# EAGLE board Adaptor485_MODIF_PT_ELECROW (EAGLE 6.5.0), part 1 of 2
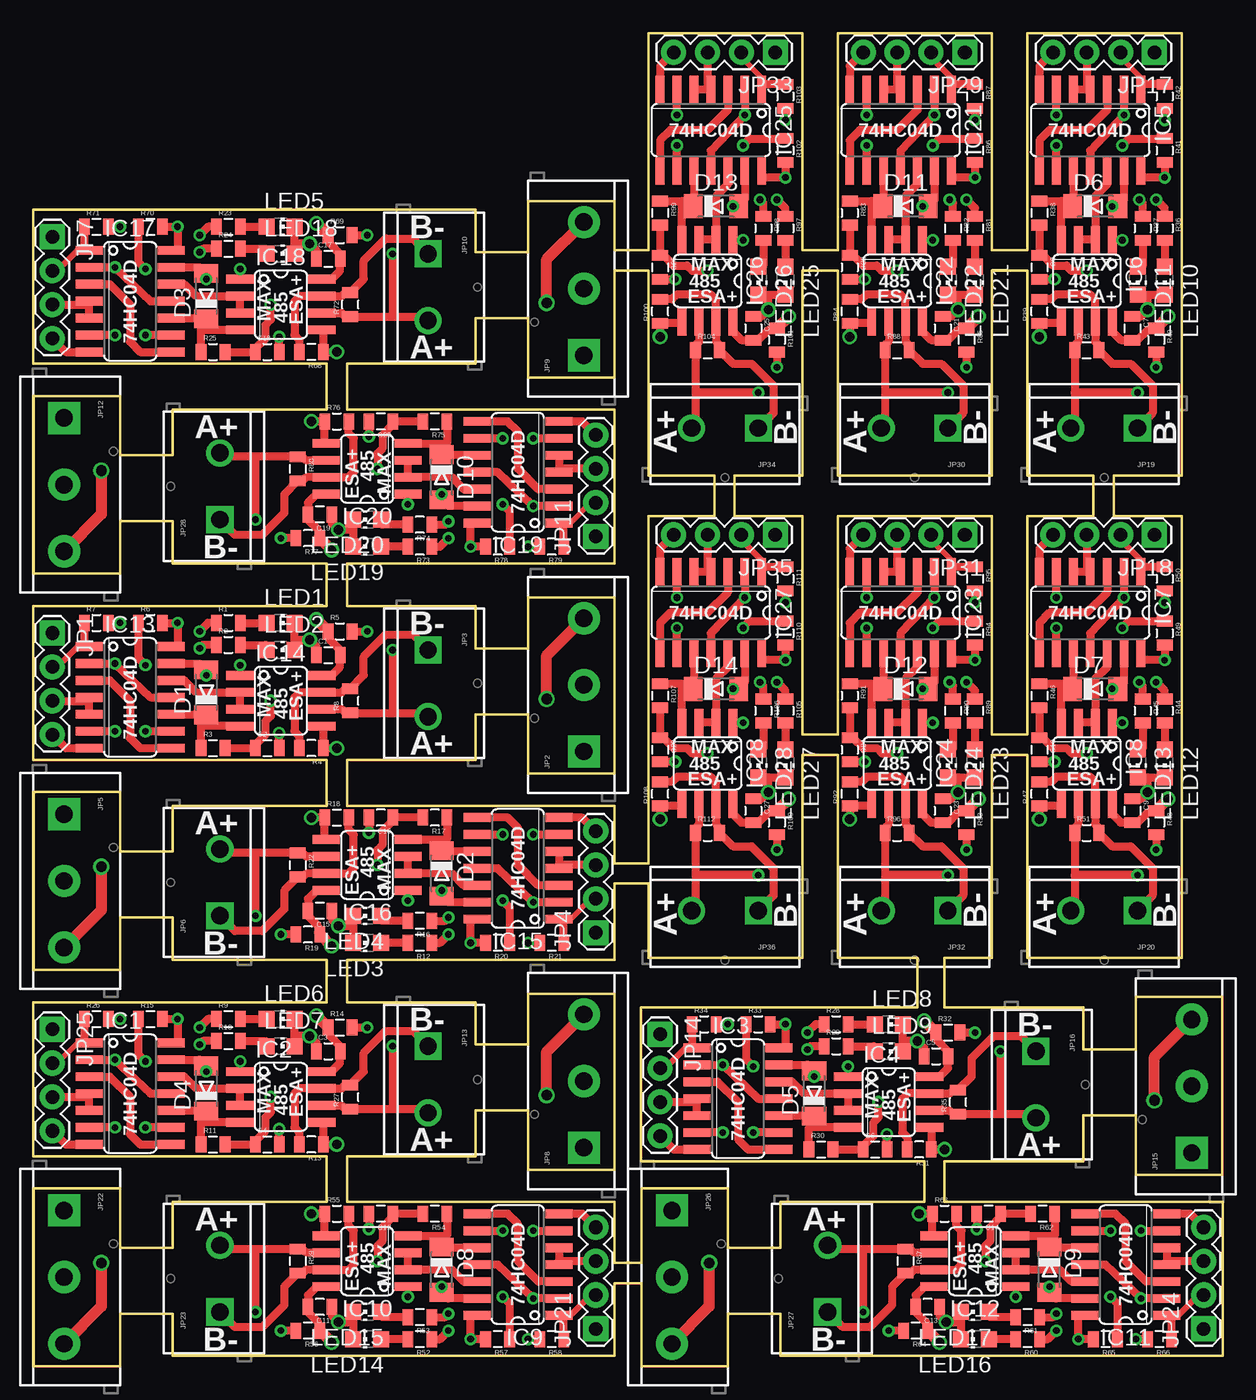
[diagram p0: board, top side]
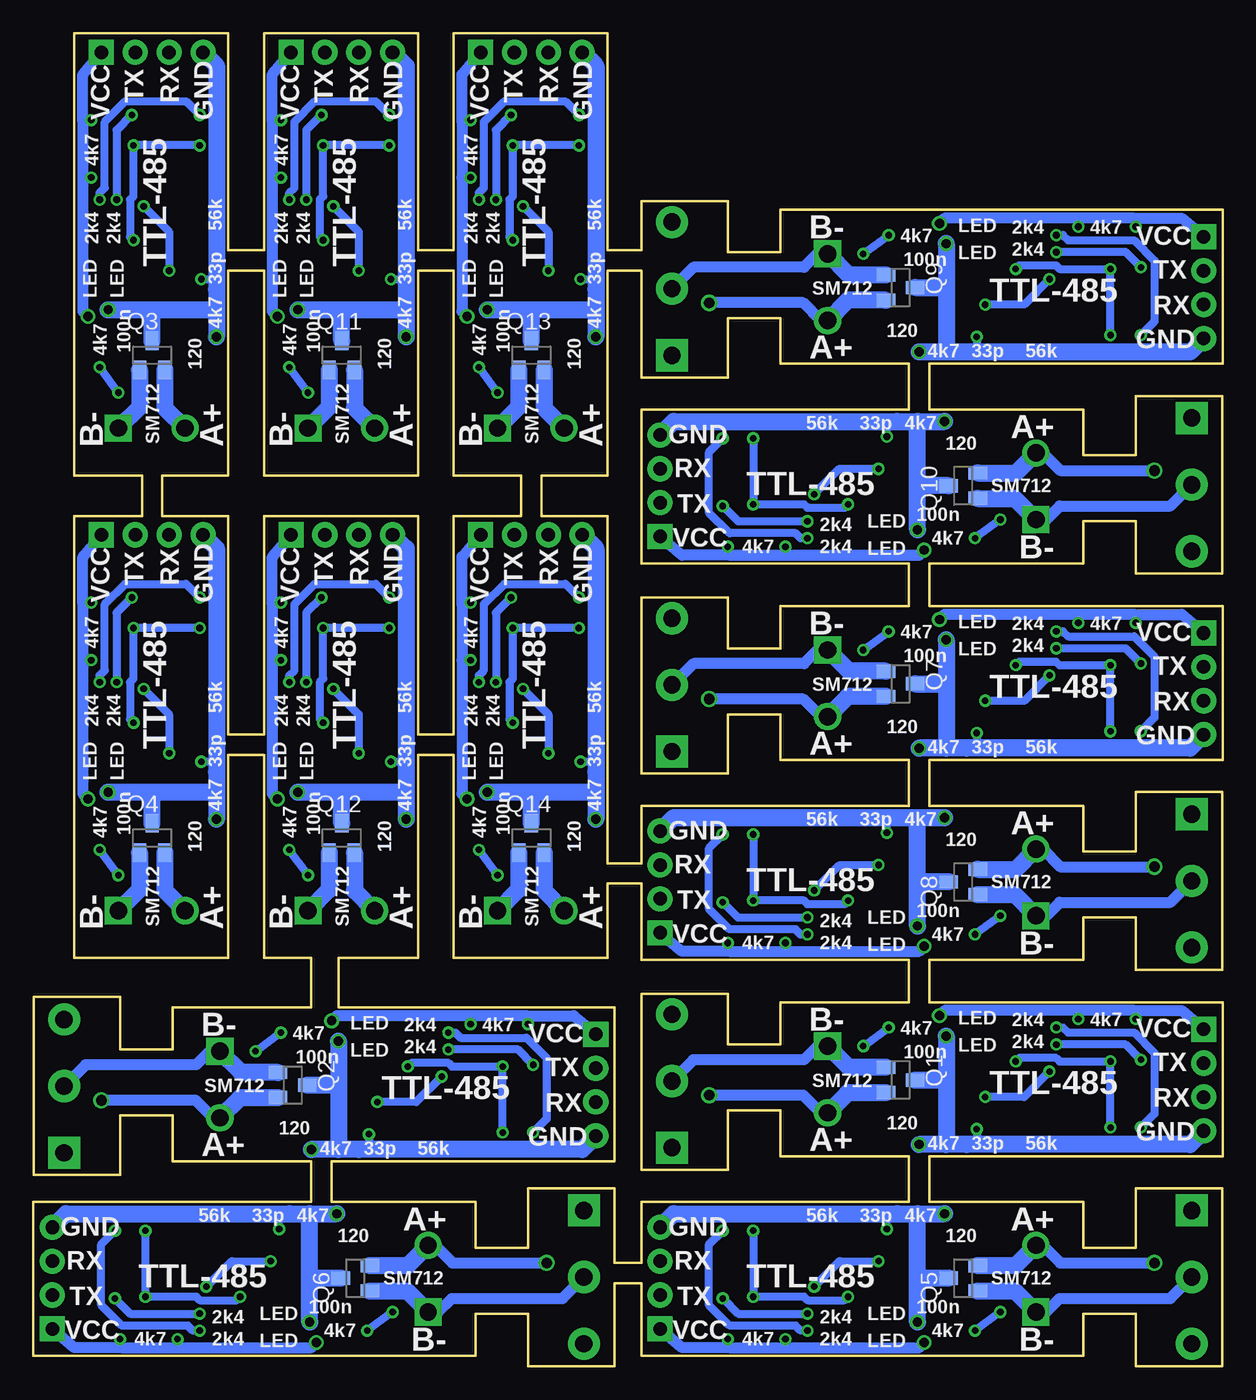
[diagram p1: board, bottom side, seen from below]

Size 89.2 x 99.97 mm. Coordinates in mm from the lower left corner, seen from the top.
Outline: 37.11,24.13 33.17,24.13 33.17,27.3 23.52,27.3 23.52,30.48 43.59,30.48 43.59,36.2 46.13,36.2 46.13,30.61 57.68,30.61 57.68,45.85 60.35,45.85 60.35,30.61 66.32,30.61 66.32,26.92 45.59,26.92 45.59,15.37 66.83,15.37 66.83,12.32 56.03,12.32 56.03,8.89 52.1,8.89 52.1,13.34 45.62,13.34 45.62,7.75 43.59,7.75 43.59,12.32 23.52,12.32 23.52,15.75 33.17,15.75 33.17,19.18 37.11,19.18 37.11,14.73 43.59,14.73 43.59,27.94 37.11,27.94 37.11,24.13
Outline: 22,27.3 0,27.3 0,15.75 22,15.75 22,12.32 10.44,12.32 10.44,8.89 6.5,8.89 6.5,13.34 0.03,13.34 0.03,0 6.5,0 6.5,3.94 10.44,3.94 10.44,0.76 43.59,0.76 43.59,6.22 45.62,6.22 45.62,0 52.1,0 52.1,3.94 56.03,3.94 56.03,0.76 89.2,0.76 89.2,12.32 68.35,12.32 68.35,15.37 78.77,15.37 78.77,18.8 82.7,18.8 82.7,14.35 89.18,14.35 89.18,27.69 82.7,27.69 82.7,23.75 78.77,23.75 78.77,26.92 68.35,26.92 68.35,30.61 71.91,30.61 71.91,45.85 74.57,45.85 74.57,30.61 86.13,30.61 86.13,63.75 81.05,63.75 81.05,66.8 86.13,66.8 86.13,99.97 74.57,99.97 74.57,83.69 71.91,83.69 71.91,99.97 60.35,99.97 60.35,83.69 57.68,83.69 57.68,99.97 46.13,99.97 46.13,83.69 43.59,83.69 43.59,87.38 37.11,87.38 37.11,83.57 33.17,83.57 33.17,86.74 0,86.74 0,75.18 22,75.18 22,71.75 10.44,71.75 10.44,68.33 6.5,68.33 6.5,72.77 0.03,72.77 0.03,59.44 6.5,59.44 6.5,63.37 10.44,63.37 10.44,60.2 22,60.2 22,57.02 0,57.02 0,45.47 22,45.47 22,42.04 10.44,42.04 10.44,38.61 6.5,38.61 6.5,43.05 0.03,43.05 0.03,29.72 6.5,29.72 6.5,33.66 10.44,33.66 10.44,30.48 22,30.48 22,27.3
Outline: 74.57,82.17 74.57,66.8 79.53,66.8 79.53,63.75 74.57,63.75 74.57,47.37 71.91,47.37 71.91,63.75 60.35,63.75 60.35,47.37 57.68,47.37 57.68,63.75 52.6,63.75 52.6,66.8 57.68,66.8 57.68,82.17 60.35,82.17 60.35,66.8 71.91,66.8 71.91,82.17 74.57,82.17
Outline: 37.11,53.85 33.17,53.85 33.17,57.02 23.52,57.02 23.52,60.2 43.59,60.2 43.59,71.75 23.52,71.75 23.52,75.18 33.17,75.18 33.17,78.61 37.11,78.61 37.11,74.17 43.59,74.17 43.59,82.17 46.13,82.17 46.13,66.8 51.08,66.8 51.08,63.75 46.13,63.75 46.13,37.72 43.59,37.72 43.59,42.04 23.52,42.04 23.52,45.47 33.17,45.47 33.17,48.9 37.11,48.9 37.11,44.45 43.59,44.45 43.59,57.66 37.11,57.66 37.11,53.85
Copper layers (1*16): Top 0.035mm / dielectric 1.5mm / Bottom 0.035mm
Design rules "default *": minimum track width 10mil, minimum drill 24mil, track to track 8mil, track to pad 8mil, pad to pad 8mil, via to via 8mil, smd to smd 8mil, copper to edge 40mil, drill to drill 8mil, minimum pad ring 10mil, minimum via ring 8mil, stop-mask expansion 4mil, vias tented up to drill 24mil, thermal gap 10mil

## Footprints (pad centres in the part's own frame; a part is rotated, then mirrored left to right if it is on the bottom)
0805 = smd 0.8 x 1.2: 1 -0.9,0; 2 0.9,0
MINIMELF = smd 1.4 x 1.8: A 1.7,0; C -1.7,0
SO14 = smd 0.66 x 2.032: 1 -3.81,-3.073; 2 -2.54,-3.073; 3 -1.27,-3.073; 4 0,-3.073; 5 1.27,-3.073; 6 2.54,-3.073; 7 3.81,-3.073; 8 3.81,3.073; 9 2.54,3.073; 10 1.27,3.073; 11 0,3.073; 12 -1.27,3.073; 13 -2.54,3.073; 14 -3.81,3.073
SO08 = smd 0.66 x 2.032: 1 -1.905,-3.073; 2 -0.635,-3.073; 3 0.635,-3.073; 4 1.905,-3.073; 5 1.905,3.073; 6 0.635,3.073; 7 -0.635,3.073; 8 -1.905,3.073
1X04 = drill 1.016 pad 1.88 square: 1 0,0 | drill 1.016 pad 1.88: 2 2.54,0; 3 5.08,0; 4 7.62,0
SCREWTERMINAL-5MM-3 = drill 1.3 pad 2.413 square: 1 0,0 | drill 1.3 pad 2.413: 2 5,0; 3 10,0
SCREWTERMINAL-5MM-2 = drill 1.3 pad 2.032 square: 1 0,0 | drill 1.3 pad 2.032: 2 5,0
CHIP-LED0805 = smd 1.2 x 1.2: A 0,-1.05; C 0,1.05
SOT23 = smd 1 x 1.4: 1 -0.95,-1.1; 2 0.95,-1.1; 3 0,1.1

## Placement (x,y rotation side)
C1  100n  [0805]  22.12,53.34 0 top
C2  33pF  [0805]  17.55,46.35 0 top
C3  100n  [0805]  22.12,23.62 0 top
C4  33pF  [0805]  17.55,16.64 0 top
C5  100n  [0805]  67.72,23.24 0 top
C6  33pF  [0805]  63.14,16.26 0 top
C7  100n  [0805]  82.45,77.85 270 top
C8  33pF  [0805]  75.46,82.42 270 top
C9  100n  [0805]  82.45,41.66 270 top
C10  33pF  [0805]  75.46,46.23 270 top
C11  100n  [0805]  21.49,4.45 180 top
C12  33pF  [0805]  26.06,11.43 180 top
C13  100n  [0805]  67.08,4.45 180 top
C14  33pF  [0805]  71.65,11.43 180 top
C15  100n  [0805]  21.49,34.16 180 top
C16  33pF  [0805]  26.06,41.15 180 top
C17  100n  [0805]  22.12,83.06 0 top
C18  33pF  [0805]  17.55,76.07 0 top
C19  100n  [0805]  21.49,63.88 180 top
C20  33pF  [0805]  26.06,70.87 180 top
C21  100n  [0805]  68.22,77.85 270 top
C22  33pF  [0805]  61.24,82.42 270 top
C23  100n  [0805]  68.22,41.66 270 top
C24  33pF  [0805]  61.24,46.23 270 top
C25  100n  [0805]  54,77.85 270 top
C26  33pF  [0805]  47.02,82.42 270 top
C27  100n  [0805]  54,41.66 270 top
C28  33pF  [0805]  47.02,46.23 270 top
D1  1N4148  [MINIMELF]  12.98,50.55 90 top
D2  1N4148  [MINIMELF]  30.63,36.96 270 top
D3  1N4148  [MINIMELF]  12.98,80.26 90 top
D4  1N4148  [MINIMELF]  12.98,20.83 90 top
D5  1N4148  [MINIMELF]  58.57,20.45 90 top
D6  1N4148  [MINIMELF]  79.65,87 0 top
D7  1N4148  [MINIMELF]  79.65,50.8 0 top
D8  1N4148  [MINIMELF]  30.63,7.24 270 top
D9  1N4148  [MINIMELF]  76.23,7.24 270 top
D10  1N4148  [MINIMELF]  30.63,66.67 270 top
D11  1N4148  [MINIMELF]  65.43,87 0 top
D12  1N4148  [MINIMELF]  65.43,50.8 0 top
D13  1N4148  [MINIMELF]  51.21,87 0 top
D14  1N4148  [MINIMELF]  51.21,50.8 0 top
IC1  74HC04D  [SO14]  7.26,20.45 270 top
IC2  MAX3468CSA  [SO08]  18.57,20.19 270 top
IC3  74HC04D  [SO14]  52.86,20.07 270 top
IC4  MAX3468CSA  [SO08]  64.16,19.81 270 top
IC5  74HC04D  [SO14]  79.27,92.71 180 top
IC6  MAX3468CSA  [SO08]  79.02,81.41 180 top
IC7  74HC04D  [SO14]  79.27,56.52 180 top
IC8  MAX3468CSA  [SO08]  79.02,45.21 180 top
IC9  74HC04D  [SO14]  36.35,7.62 90 top
IC10  MAX3468CSA  [SO08]  25.04,7.87 90 top
IC11  74HC04D  [SO14]  81.94,7.62 90 top
IC12  MAX3468CSA  [SO08]  70.64,7.87 90 top
IC13  74HC04D  [SO14]  7.26,50.16 270 top
IC14  MAX3468CSA  [SO08]  18.57,49.91 270 top
IC15  74HC04D  [SO14]  36.35,37.34 90 top
IC16  MAX3468CSA  [SO08]  25.04,37.59 90 top
IC17  74HC04D  [SO14]  7.26,79.88 270 top
IC18  MAX3468CSA  [SO08]  18.57,79.63 270 top
IC19  74HC04D  [SO14]  36.35,67.06 90 top
IC20  MAX3468CSA  [SO08]  25.04,67.31 90 top
IC21  74HC04D  [SO14]  65.05,92.71 180 top
IC22  MAX3468CSA  [SO08]  64.8,81.41 180 top
IC23  74HC04D  [SO14]  65.05,56.52 180 top
IC24  MAX3468CSA  [SO08]  64.8,45.21 180 top
IC25  74HC04D  [SO14]  50.83,92.71 180 top
IC26  MAX3468CSA  [SO08]  50.57,81.41 180 top
IC27  74HC04D  [SO14]  50.83,56.52 180 top
IC28  MAX3468CSA  [SO08]  50.57,45.21 180 top
JP1  [1X04]  1.42,54.99 270 top
JP2  [SCREWTERMINAL-5MM-3]  41.3,46.1 90 top
JP3  [SCREWTERMINAL-5MM-2]  29.62,53.72 270 top
JP4  [1X04]  42.19,32.51 90 top
JP5  [SCREWTERMINAL-5MM-3]  2.31,41.4 270 top
JP6  [SCREWTERMINAL-5MM-2]  14,33.78 90 top
JP7  [1X04]  1.42,84.71 270 top
JP8  [SCREWTERMINAL-5MM-3]  41.3,16.38 90 top
JP9  [SCREWTERMINAL-5MM-3]  41.3,75.82 90 top
JP10  [SCREWTERMINAL-5MM-2]  29.62,83.44 270 top
JP11  [1X04]  42.19,62.23 90 top
JP12  [SCREWTERMINAL-5MM-3]  2.31,71.12 270 top
JP13  [SCREWTERMINAL-5MM-2]  29.62,24 270 top
JP14  [1X04]  47.02,24.89 270 top
JP15  [SCREWTERMINAL-5MM-3]  86.89,16 90 top
JP16  [SCREWTERMINAL-5MM-2]  75.21,23.62 270 top
JP17  [1X04]  84.1,98.55 180 top
JP18  [1X04]  84.1,62.36 180 top
JP19  [SCREWTERMINAL-5MM-2]  82.83,70.36 180 top
JP20  [SCREWTERMINAL-5MM-2]  82.83,34.16 180 top
JP21  [1X04]  42.19,2.79 90 top
JP22  [SCREWTERMINAL-5MM-3]  2.31,11.68 270 top
JP23  [SCREWTERMINAL-5MM-2]  14,4.06 90 top
JP24  [1X04]  87.78,2.79 90 top
JP25  [1X04]  1.42,25.27 270 top
JP26  [SCREWTERMINAL-5MM-3]  47.9,11.68 270 top
JP27  [SCREWTERMINAL-5MM-2]  59.59,4.06 90 top
JP28  [SCREWTERMINAL-5MM-2]  14,63.5 90 top
JP29  [1X04]  69.88,98.55 180 top
JP30  [SCREWTERMINAL-5MM-2]  68.61,70.36 180 top
JP31  [1X04]  69.88,62.36 180 top
JP32  [SCREWTERMINAL-5MM-2]  68.61,34.16 180 top
JP33  [1X04]  55.65,98.55 180 top
JP34  [SCREWTERMINAL-5MM-2]  54.38,70.36 180 top
JP35  [1X04]  55.65,62.36 180 top
JP36  [SCREWTERMINAL-5MM-2]  54.38,34.16 180 top
LED1  [CHIP-LED0805]  18.57,55.75 270 top
LED2  [CHIP-LED0805]  18.57,53.72 270 top
LED3  [CHIP-LED0805]  25.04,31.75 90 top
LED4  [CHIP-LED0805]  25.04,33.78 90 top
LED5  [CHIP-LED0805]  18.57,85.47 270 top
LED6  [CHIP-LED0805]  18.57,26.04 270 top
LED7  [CHIP-LED0805]  18.57,24 270 top
LED8  [CHIP-LED0805]  64.16,25.65 270 top
LED9  [CHIP-LED0805]  64.16,23.62 270 top
LED10  [CHIP-LED0805]  84.86,81.41 180 top
LED11  [CHIP-LED0805]  82.83,81.41 180 top
LED12  [CHIP-LED0805]  84.86,45.21 180 top
LED13  [CHIP-LED0805]  82.83,45.21 180 top
LED14  [CHIP-LED0805]  25.04,2.03 90 top
LED15  [CHIP-LED0805]  25.04,4.06 90 top
LED16  [CHIP-LED0805]  70.64,2.03 90 top
LED17  [CHIP-LED0805]  70.64,4.06 90 top
LED18  [CHIP-LED0805]  18.57,83.44 270 top
LED19  [CHIP-LED0805]  25.04,61.47 90 top
LED20  [CHIP-LED0805]  25.04,63.5 90 top
LED21  [CHIP-LED0805]  70.64,81.41 180 top
LED22  [CHIP-LED0805]  68.61,81.41 180 top
LED23  [CHIP-LED0805]  70.64,45.21 180 top
LED24  [CHIP-LED0805]  68.61,45.21 180 top
LED25  [CHIP-LED0805]  56.41,81.41 180 top
LED26  [CHIP-LED0805]  54.38,81.41 180 top
LED27  [CHIP-LED0805]  56.41,45.21 180 top
LED28  [CHIP-LED0805]  54.38,45.21 180 top
Q1  BCX70SMD  [SOT23]  24.16,21.46 270 bottom
Q2  BCX70SMD  [SOT23]  69.75,21.08 270 bottom
Q3  BCX70SMD  [SOT23]  80.29,75.82 0 bottom
Q4  BCX70SMD  [SOT23]  80.29,39.62 0 bottom
Q5  BCX70SMD  [SOT23]  19.46,6.6 90 bottom
Q6  BCX70SMD  [SOT23]  65.05,6.6 90 bottom
Q7  BCX70SMD  [SOT23]  24.16,51.18 270 bottom
Q8  BCX70SMD  [SOT23]  19.46,36.32 90 bottom
Q9  BCX70SMD  [SOT23]  24.16,80.9 270 bottom
Q10  BCX70SMD  [SOT23]  19.46,66.04 90 bottom
Q11  BCX70SMD  [SOT23]  66.07,75.82 0 bottom
Q12  BCX70SMD  [SOT23]  66.07,39.62 0 bottom
Q13  BCX70SMD  [SOT23]  51.84,75.82 0 bottom
Q14  BCX70SMD  [SOT23]  51.84,39.62 0 bottom
R1  2K4  [0805]  14.63,55.75 0 top
R2  2K4  [0805]  14.63,54.1 0 top
R3  56K  [0805]  13.49,46.35 0 top
R4  4K7  [0805]  20.85,46.35 180 top
R5  4K7  [0805]  23.01,55.12 0 top
R6  4K7  [0805]  8.79,55.75 0 top
R7  4K7  [0805]  4.72,55.75 0 top
R8  120  [0805]  23.77,49.91 90 top
R9  2K4  [0805]  14.63,26.04 0 top
R10  2K4  [0805]  14.63,24.38 0 top
R11  56K  [0805]  13.49,16.64 0 top
R12  2K4  [0805]  28.98,31.75 180 top
R13  4K7  [0805]  20.85,16.64 180 top
R14  4K7  [0805]  23.01,25.4 0 top
R15  4K7  [0805]  8.79,26.04 0 top
R16  2K4  [0805]  28.98,33.4 180 top
R17  56K  [0805]  30.12,41.15 180 top
R18  4K7  [0805]  22.76,41.15 0 top
R19  4K7  [0805]  20.6,32.38 180 top
R20  4K7  [0805]  34.82,31.75 180 top
R21  4K7  [0805]  38.89,31.75 180 top
R22  120  [0805]  19.84,37.59 270 top
R23  2K4  [0805]  14.63,85.47 0 top
R24  2K4  [0805]  14.63,83.82 0 top
R25  56K  [0805]  13.49,76.07 0 top
R26  4K7  [0805]  4.72,26.04 0 top
R27  120  [0805]  23.77,20.19 90 top
R28  2K4  [0805]  60.22,25.65 0 top
R29  2K4  [0805]  60.22,24 0 top
R30  56K  [0805]  59.08,16.26 0 top
R31  4K7  [0805]  66.45,16.26 180 top
R32  4K7  [0805]  68.61,25.02 0 top
R33  4K7  [0805]  54.38,25.65 0 top
R34  4K7  [0805]  50.32,25.65 0 top
R35  120  [0805]  69.37,19.81 90 top
R36  2K4  [0805]  84.86,85.34 270 top
R37  2K4  [0805]  83.21,85.34 270 top
R38  56K  [0805]  75.46,86.49 270 top
R39  4K7  [0805]  75.46,79.12 90 top
R40  4K7  [0805]  84.23,76.96 270 top
R41  4K7  [0805]  84.86,91.19 270 top
R42  4K7  [0805]  84.86,95.25 270 top
R43  120  [0805]  79.02,76.2 0 top
R44  2K4  [0805]  84.86,49.15 270 top
R45  2K4  [0805]  83.21,49.15 270 top
R46  56K  [0805]  75.46,50.29 270 top
R47  4K7  [0805]  75.46,42.93 90 top
R48  4K7  [0805]  84.23,40.77 270 top
R49  4K7  [0805]  84.86,54.99 270 top
R50  4K7  [0805]  84.86,59.05 270 top
R51  120  [0805]  79.02,40.01 0 top
R52  2K4  [0805]  28.98,2.03 180 top
R53  2K4  [0805]  28.98,3.68 180 top
R54  56K  [0805]  30.12,11.43 180 top
R55  4K7  [0805]  22.76,11.43 0 top
R56  4K7  [0805]  20.6,2.67 180 top
R57  4K7  [0805]  34.82,2.03 180 top
R58  4K7  [0805]  38.89,2.03 180 top
R59  120  [0805]  19.84,7.87 270 top
R60  2K4  [0805]  74.57,2.03 180 top
R61  2K4  [0805]  74.57,3.68 180 top
R62  56K  [0805]  75.72,11.43 180 top
R63  4K7  [0805]  68.35,11.43 0 top
R64  4K7  [0805]  66.19,2.67 180 top
R65  4K7  [0805]  80.42,2.03 180 top
R66  4K7  [0805]  84.48,2.03 180 top
R67  120  [0805]  65.43,7.87 270 top
R68  4K7  [0805]  20.85,76.07 180 top
R69  4K7  [0805]  23.01,84.84 0 top
R70  4K7  [0805]  8.79,85.47 0 top
R71  4K7  [0805]  4.72,85.47 0 top
R72  120  [0805]  23.77,79.63 90 top
R73  2K4  [0805]  28.98,61.47 180 top
R74  2K4  [0805]  28.98,63.12 180 top
R75  56K  [0805]  30.12,70.87 180 top
R76  4K7  [0805]  22.76,70.87 0 top
R77  4K7  [0805]  20.6,62.1 180 top
R78  4K7  [0805]  34.82,61.47 180 top
R79  4K7  [0805]  38.89,61.47 180 top
R80  120  [0805]  19.84,67.31 270 top
R81  2K4  [0805]  70.64,85.34 270 top
R82  2K4  [0805]  68.99,85.34 270 top
R83  56K  [0805]  61.24,86.49 270 top
R84  4K7  [0805]  61.24,79.12 90 top
R85  4K7  [0805]  70,76.96 270 top
R86  4K7  [0805]  70.64,91.19 270 top
R87  4K7  [0805]  70.64,95.25 270 top
R88  120  [0805]  64.8,76.2 0 top
R89  2K4  [0805]  70.64,49.15 270 top
R90  2K4  [0805]  68.99,49.15 270 top
R91  56K  [0805]  61.24,50.29 270 top
R92  4K7  [0805]  61.24,42.93 90 top
R93  4K7  [0805]  70,40.77 270 top
R94  4K7  [0805]  70.64,54.99 270 top
R95  4K7  [0805]  70.64,59.05 270 top
R96  120  [0805]  64.8,40.01 0 top
R97  2K4  [0805]  56.41,85.34 270 top
R98  2K4  [0805]  54.76,85.34 270 top
R99  56K  [0805]  47.02,86.49 270 top
R100  4K7  [0805]  47.02,79.12 90 top
R101  4K7  [0805]  55.78,76.96 270 top
R102  4K7  [0805]  56.41,91.19 270 top
R103  4K7  [0805]  56.41,95.25 270 top
R104  120  [0805]  50.57,76.2 0 top
R105  2K4  [0805]  56.41,49.15 270 top
R106  2K4  [0805]  54.76,49.15 270 top
R107  56K  [0805]  47.02,50.29 270 top
R108  4K7  [0805]  47.02,42.93 90 top
R109  4K7  [0805]  55.78,40.77 270 top
R110  4K7  [0805]  56.41,54.99 270 top
R111  4K7  [0805]  56.41,59.05 270 top
R112  120  [0805]  50.57,40.01 0 top

## Library data of the parts
C1-C28 R1-R112 = SparkFun-Passives
D1-D14 = diode
IC1 IC3 IC5 IC7 IC9 IC11 IC13 IC15 IC17 IC19 IC21 IC23 IC25 IC27 = 74xx-eu
IC2 IC4 IC6 IC8 IC10 IC12 IC14 IC16 IC18 IC20 IC22 IC24 IC26 IC28 = maxim; MPN: MAX3468CSA+; OC_FARNELL: unknown; OC_NEWARK: 76K6721
JP1 JP3 JP4 JP6 JP7 JP10 JP11 JP13 JP14 JP16-JP21 JP23-JP25 JP27-JP36 = SparkFun-Connectors
JP2 JP5 JP8 JP9 JP12 JP15 JP22 JP26 = SparkFun-Connectors; STOREFRONT_ID: PRT-08433
LED1-LED28 = led
Q1-Q14 = transistor-npn

## Nets
3.3V1: C5.2 IC3.14 IC4.8 JP14.1 R32.1 R33.2 R34.2
3.3V2: C7.2 IC5.14 IC6.8 JP17.1 R40.1 R41.2 R42.2
3.3V3: C9.2 IC7.14 IC8.8 JP18.1 R48.1 R49.2 R50.2
3.3V4: C11.2 IC9.14 IC10.8 JP21.1 R56.1 R57.2 R58.2
3.3V5: C13.2 IC11.14 IC12.8 JP24.1 R64.1 R65.2 R66.2
3.3V6: C15.2 IC15.14 IC16.8 JP4.1 R19.1 R20.2 R21.2
3.3V7: C19.2 IC19.14 IC20.8 JP11.1 R77.1 R78.2 R79.2
3.3V8: C21.2 IC21.14 IC22.8 JP29.1 R85.1 R86.2 R87.2
3.3V9: C23.2 IC23.14 IC24.8 JP31.1 R93.1 R94.2 R95.2
3.3V10: C25.2 IC25.14 IC26.8 JP33.1 R101.1 R102.2 R103.2
3.3V11: C27.2 IC27.14 IC28.8 JP35.1 R109.1 R110.2 R111.2
A+: IC2.6 JP8.3 JP13.2 Q1.2 R14.2 R27.1
A+1: IC4.6 JP15.3 JP16.2 Q2.2 R32.2 R35.1
A+2: IC6.6 JP19.2 Q3.2 R40.2 R43.1
A+3: IC8.6 JP20.2 Q4.2 R48.2 R51.1
A+4: IC10.6 JP22.3 JP23.2 Q5.2 R56.2 R59.1
A+5: IC12.6 JP26.3 JP27.2 Q6.2 R64.2 R67.1
A+6: IC14.6 JP2.3 JP3.2 Q7.2 R5.2 R8.1
A+7: IC16.6 JP5.3 JP6.2 Q8.2 R19.2 R22.1
A+8: IC18.6 JP9.3 JP10.2 Q9.2 R69.2 R72.1
A+9: IC20.6 JP12.3 JP28.2 Q10.2 R77.2 R80.1
A+10: IC22.6 JP30.2 Q11.2 R85.2 R88.1
A+11: IC24.6 JP32.2 Q12.2 R93.2 R96.1
A+12: IC26.6 JP34.2 Q13.2 R101.2 R104.1
A+13: IC28.6 JP36.2 Q14.2 R109.2 R112.1
B-: IC2.7 JP8.2 JP13.1 Q1.1 R13.2 R27.2
B-1: IC4.7 JP15.2 JP16.1 Q2.1 R31.2 R35.2
B-2: IC6.7 JP19.1 Q3.1 R39.2 R43.2
B-3: IC8.7 JP20.1 Q4.1 R47.2 R51.2
B-4: IC10.7 JP22.2 JP23.1 Q5.1 R55.2 R59.2
B-5: IC12.7 JP26.2 JP27.1 Q6.1 R63.2 R67.2
B-6: IC14.7 JP2.2 JP3.1 Q7.1 R4.2 R8.2
B-7: IC16.7 JP5.2 JP6.1 Q8.1 R18.2 R22.2
B-8: IC18.7 JP9.2 JP10.1 Q9.1 R68.2 R72.2
B-9: IC20.7 JP12.2 JP28.1 Q10.1 R76.2 R80.2
B-10: IC22.7 JP30.1 Q11.1 R84.2 R88.2
B-11: IC24.7 JP32.1 Q12.1 R92.2 R96.2
B-12: IC26.7 JP34.1 Q13.1 R100.2 R104.2
B-13: IC28.7 JP36.1 Q14.1 R108.2 R112.2
GND: C3.1 C4.2 IC1.7 IC2.5 JP25.4 LED6.C LED7.C Q1.3 R13.1
GND2: C5.1 C6.2 IC3.7 IC4.5 JP14.4 LED8.C LED9.C Q2.3 R31.1
GND3: C7.1 C8.2 IC5.7 IC6.5 JP17.4 LED10.C LED11.C Q3.3 R39.1
GND4: C9.1 C10.2 IC7.7 IC8.5 JP18.4 LED12.C LED13.C Q4.3 R47.1
GND5: C11.1 C12.2 IC9.7 IC10.5 JP21.4 LED14.C LED15.C Q5.3 R55.1
GND6: C13.1 C14.2 IC11.7 IC12.5 JP24.4 LED16.C LED17.C Q6.3 R63.1
GND7: C1.1 C2.2 IC13.7 IC14.5 JP1.4 LED1.C LED2.C Q7.3 R4.1
GND8: C15.1 C16.2 IC15.7 IC16.5 JP4.4 LED3.C LED4.C Q8.3 R18.1
GND9: C17.1 C18.2 IC17.7 IC18.5 JP7.4 LED5.C LED18.C Q9.3 R68.1
GND10: C19.1 C20.2 IC19.7 IC20.5 JP11.4 LED19.C LED20.C Q10.3 R76.1
GND11: C21.1 C22.2 IC21.7 IC22.5 JP29.4 LED21.C LED22.C Q11.3 R84.1
GND12: C23.1 C24.2 IC23.7 IC24.5 JP31.4 LED23.C LED24.C Q12.3 R92.1
GND13: C25.1 C26.2 IC25.7 IC26.5 JP33.4 LED25.C LED26.C Q13.3 R100.1
GND14: C27.1 C28.2 IC27.7 IC28.5 JP35.4 LED27.C LED28.C Q14.3 R108.1
N$1: IC13.9 IC14.1 R6.1
N$2: IC13.3 IC13.8
N$3: C2.1 D1.A IC13.13 R3.2
N$4: IC13.6 R1.1
N$5: D1.C IC13.10 IC14.4 R3.1
N$6: IC13.12 IC14.2 IC14.3
N$7: LED2.A R2.2
N$8: LED1.A R1.2
N$9: IC13.2 IC13.11 R2.1
N$10: IC15.9 IC16.1 R20.1
N$11: IC15.3 IC15.8
N$12: C16.1 D2.A IC15.13 R17.2
N$13: IC3.9 IC4.1 R33.1
N$14: IC3.3 IC3.8
N$15: C6.1 D5.A IC3.13 R30.2
N$16: LED7.A R10.2
N$17: LED6.A R9.2
N$18: IC3.6 R28.1
N$19: IC1.2 IC1.11 R10.1
N$20: D5.C IC3.10 IC4.4 R30.1
N$21: IC1.9 IC2.1 R15.1
N$22: IC15.6 R12.1
N$23: IC1.3 IC1.8
N$24: C4.1 D4.A IC1.13 R11.2
N$25: IC3.12 IC4.2 IC4.3
N$26: LED9.A R29.2
N$27: IC1.6 R9.1
N$28: LED8.A R28.2
N$29: D4.C IC1.10 IC2.4 R11.1
N$30: IC1.12 IC2.2 IC2.3
N$31: IC3.2 IC3.11 R29.1
N$32: IC5.9 IC6.1 R41.1
N$33: IC5.3 IC5.8
N$34: C8.1 D6.A IC5.13 R38.2
N$35: IC5.6 R36.1
N$36: D6.C IC5.10 IC6.4 R38.1
N$37: IC5.12 IC6.2 IC6.3
N$38: LED11.A R37.2
N$39: LED10.A R36.2
N$40: IC5.2 IC5.11 R37.1
N$41: IC7.9 IC8.1 R49.1
N$42: IC7.3 IC7.8
N$43: C10.1 D7.A IC7.13 R46.2
N$44: IC7.6 R44.1
N$45: D7.C IC7.10 IC8.4 R46.1
N$46: IC7.12 IC8.2 IC8.3
N$47: LED13.A R45.2
N$48: LED12.A R44.2
N$49: IC7.2 IC7.11 R45.1
N$50: IC9.9 IC10.1 R57.1
N$51: IC9.3 IC9.8
N$52: C12.1 D8.A IC9.13 R54.2
N$53: D2.C IC15.10 IC16.4 R17.1
N$54: IC15.12 IC16.2 IC16.3
N$55: LED4.A R16.2
N$56: LED3.A R12.2
N$57: IC15.2 IC15.11 R16.1
N$58: IC17.9 IC18.1 R70.1
N$59: IC17.3 IC17.8
N$60: C18.1 D3.A IC17.13 R25.2
N$61: IC17.6 R23.1
N$62: D3.C IC17.10 IC18.4 R25.1
N$63: IC9.6 R52.1
N$64: D8.C IC9.10 IC10.4 R54.1
N$65: IC9.12 IC10.2 IC10.3
N$66: LED15.A R53.2
N$67: LED14.A R52.2
N$68: IC9.2 IC9.11 R53.1
N$69: IC11.9 IC12.1 R65.1
N$70: IC11.3 IC11.8
N$71: C14.1 D9.A IC11.13 R62.2
N$72: IC11.6 R60.1
N$73: D9.C IC11.10 IC12.4 R62.1
N$74: IC11.12 IC12.2 IC12.3
N$75: LED17.A R61.2
N$76: LED16.A R60.2
N$77: IC17.12 IC18.2 IC18.3
N$78: LED18.A R24.2
N$79: IC11.2 IC11.11 R61.1
N$80: LED5.A R23.2
N$81: IC17.2 IC17.11 R24.1
N$82: IC19.9 IC20.1 R78.1
N$83: IC19.3 IC19.8
N$84: C20.1 D10.A IC19.13 R75.2
N$85: IC19.6 R73.1
N$86: D10.C IC19.10 IC20.4 R75.1
N$87: IC19.12 IC20.2 IC20.3
N$88: LED20.A R74.2
N$89: LED19.A R73.2
N$90: IC19.2 IC19.11 R74.1
N$91: IC21.9 IC22.1 R86.1
N$92: IC21.3 IC21.8
N$93: C22.1 D11.A IC21.13 R83.2
N$94: IC21.6 R81.1
N$95: D11.C IC21.10 IC22.4 R83.1
N$96: IC21.12 IC22.2 IC22.3
N$97: LED22.A R82.2
N$98: LED21.A R81.2
N$99: IC21.2 IC21.11 R82.1
N$100: IC23.9 IC24.1 R94.1
N$101: IC23.3 IC23.8
N$102: C24.1 D12.A IC23.13 R91.2
N$103: IC23.6 R89.1
N$104: D12.C IC23.10 IC24.4 R91.1
N$105: IC23.12 IC24.2 IC24.3
N$106: LED24.A R90.2
N$107: LED23.A R89.2
N$108: IC23.2 IC23.11 R90.1
N$109: IC25.9 IC26.1 R102.1
N$110: IC25.3 IC25.8
N$111: C26.1 D13.A IC25.13 R99.2
N$112: IC25.6 R97.1
N$113: D13.C IC25.10 IC26.4 R99.1
N$114: IC25.12 IC26.2 IC26.3
N$115: LED26.A R98.2
N$116: LED25.A R97.2
N$117: IC25.2 IC25.11 R98.1
N$118: IC27.9 IC28.1 R110.1
N$119: IC27.3 IC27.8
N$120: C28.1 D14.A IC27.13 R107.2
N$121: IC27.6 R105.1
N$122: D14.C IC27.10 IC28.4 R107.1
N$123: IC27.12 IC28.2 IC28.3
N$124: LED28.A R106.2
N$125: LED27.A R105.2
N$126: IC27.2 IC27.11 R106.1
RX: IC1.1 JP25.2 R26.1
RX1: IC3.1 JP14.2 R34.1
RX2: IC5.1 JP17.2 R42.1
RX3: IC7.1 JP18.2 R50.1
RX4: IC9.1 JP21.2 R58.1
RX5: IC11.1 JP24.2 R66.1
RX6: IC13.1 JP1.2 R7.1
RX7: IC15.1 JP4.2 R21.1
RX8: IC17.1 JP7.2 R71.1
RX9: IC19.1 JP11.2 R79.1
RX10: IC21.1 JP29.2 R87.1
RX11: IC23.1 JP31.2 R95.1
RX12: IC25.1 JP33.2 R103.1
RX13: IC27.1 JP35.2 R111.1
S$1: C3.2 IC1.14 IC2.8 JP25.1 R14.1 R15.2 R26.2
S$2: C1.2 IC13.14 IC14.8 JP1.1 R5.1 R6.2 R7.2
S$3: C17.2 IC17.14 IC18.8 JP7.1 R69.1 R70.2 R71.2
TX: IC1.4 IC1.5 JP25.3
TX1: IC3.4 IC3.5 JP14.3
TX2: IC5.4 IC5.5 JP17.3
TX3: IC7.4 IC7.5 JP18.3
TX4: IC9.4 IC9.5 JP21.3
TX5: IC11.4 IC11.5 JP24.3
TX6: IC13.4 IC13.5 JP1.3
TX7: IC15.4 IC15.5 JP4.3
TX8: IC17.4 IC17.5 JP7.3
TX9: IC19.4 IC19.5 JP11.3
TX10: IC21.4 IC21.5 JP29.3
TX11: IC23.4 IC23.5 JP31.3
TX12: IC25.4 IC25.5 JP33.3
TX13: IC27.4 IC27.5 JP35.3